# Altium PCB 202112AH743A100.PcbDoc (part 2 of 2)
Units mil, origin at the board's own origin, x right, y up, seen from the top; angles counter-clockwise.
Board outline 1968.5 x 1968.5 mil, 4 copper layers (Top Layer, Int1 (GND), Int2 (PWR), Bottom Layer), stack 52.573 mil thick; 109 components, 209 nets, 816 pads, 136 vias.
Unrouted connection lines stored in the file: 309.
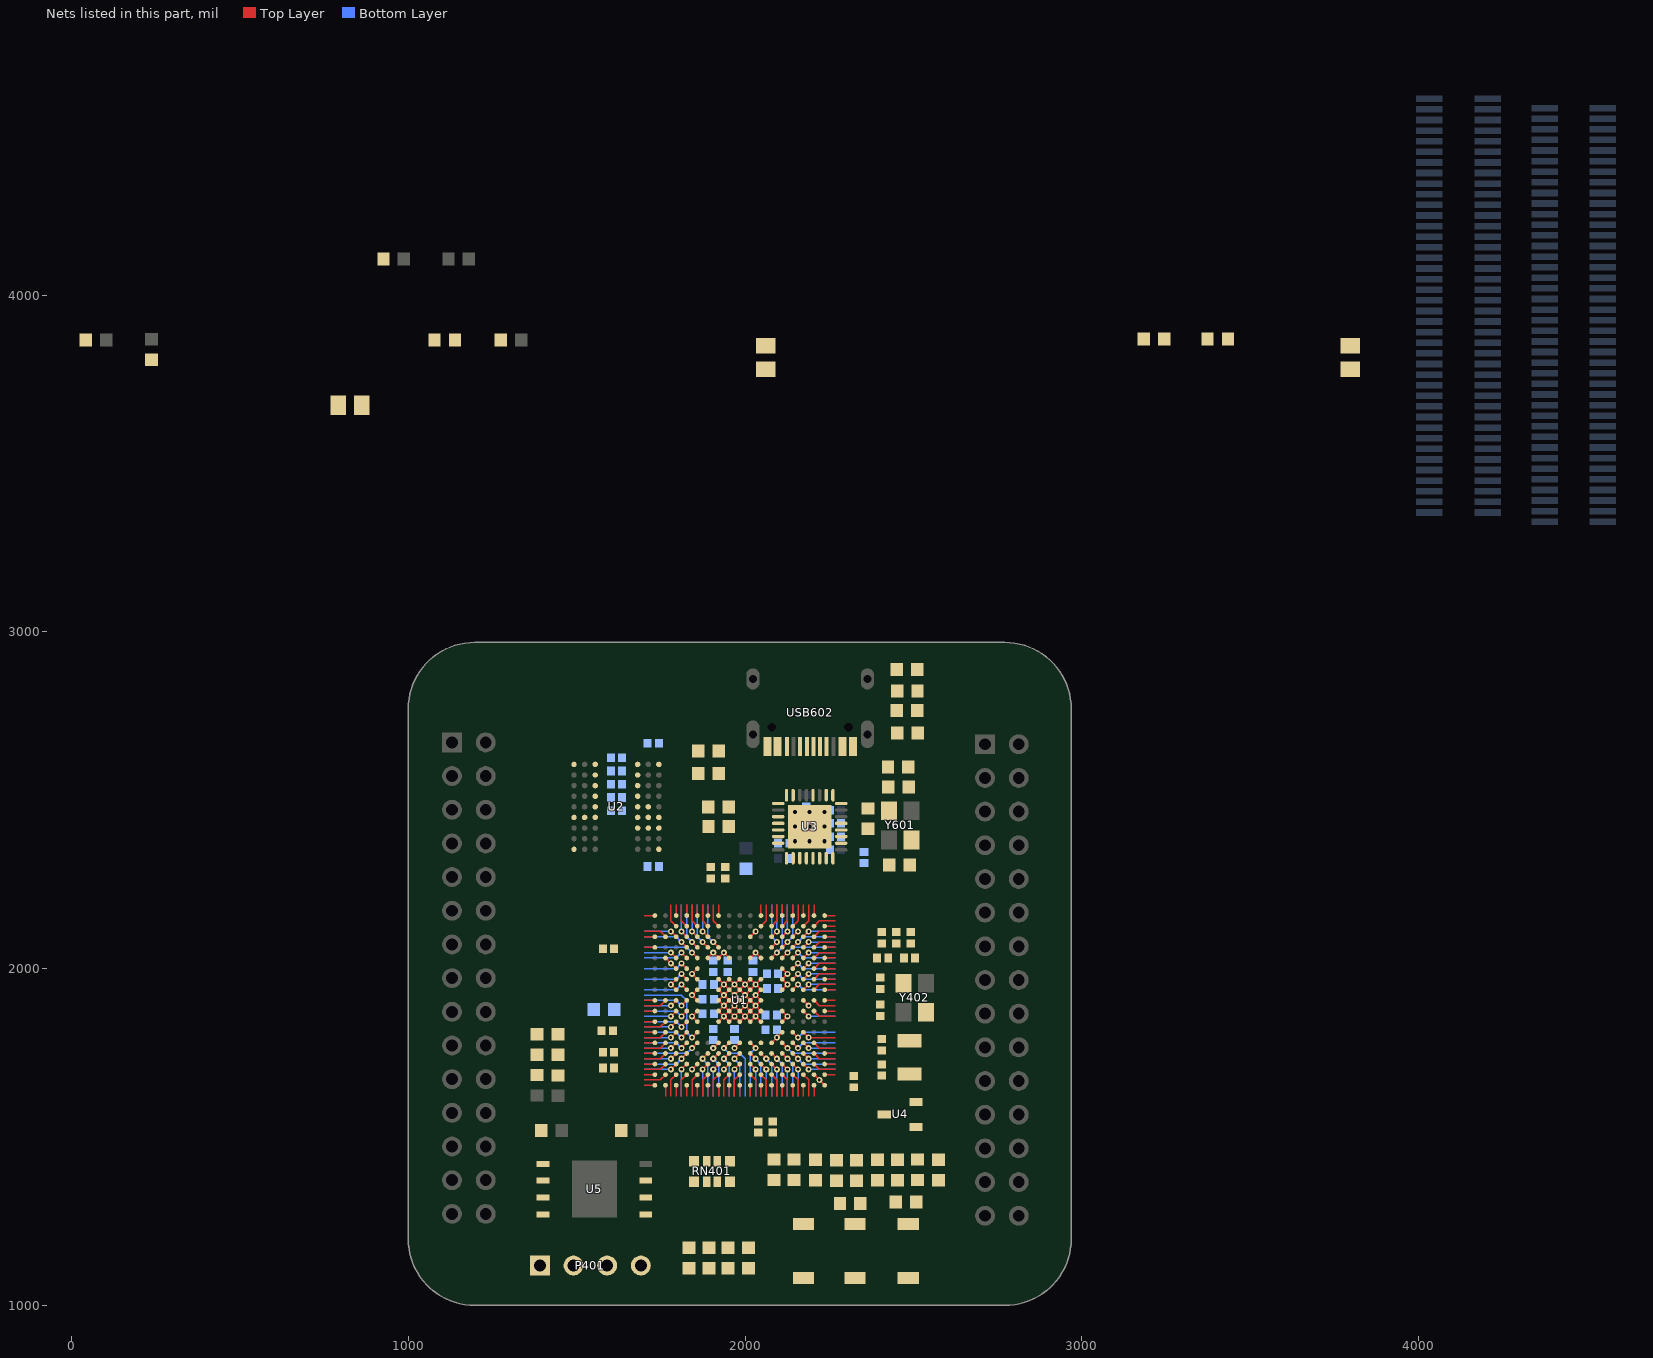
[diagram p2: the nets of this part, all layers, seen from the top]

## Via types
v1: diameter 18, hole 8, Top Layer to Bottom Layer, tented both sides, 127 vias
v2: diameter 24, hole 12, Top Layer to Bottom Layer, tented both sides, 9 vias

## Nets (pads, with @x,y where several pads share a name; then routed paths per layer and width w, separated by ;. In a path a pad name is that pad's centre, name@x,y a point inside that pad or via, vN(x,y) a via of type N, cw(c..) or ccw(c..) an arc to the next point about the centre after c; other vN are vias at no path point) (continued)
GND: C301.1 C302.1 C303.1 C304.1 C305.1 C306.1 C307.1 C308.1 C309.1 C310.1 C311.1 C312.1 C313.1 C322.1 C323.1 C324.1 C325.1 C326.1 C327.1 C328.1 C329.1 C330.1 C331.1 C333.1 C335.1 C401.1 C402.1 C403.1 C404.1 C405.1 C501.1 C502.1 C503.1 C504.1 C505.1 C506.1 C507.1 C508.1 C601.1 C603.1 C604.1 C605.1 C606.1 C607.1 C608.1 C609.1 C610.1 C611.1 C612.1 C613.1 C701.1 C901.1 C902.1 C903.1 C904.1 C905.1 C906.1 C907.1 D901.2 K401.1 K402.1 K403.1 P401.4 R402.2 R407.1 R410.1 R604.1 R607.1 R608.1 R903.1 U1.A1 U1.A17 U1.B2 U1.B6 U1.C10 U1.C13 U1.C16 U1.G7 U1.G8 U1.G9 U1.G10 U1.G11 U1.G16 U1.H7 U1.H8 U1.H9 U1.H10 U1.H11 U1.J3 U1.J7 U1.J8 U1.J9 U1.J10 U1.J11 U1.J16 U1.J17 U1.K7 U1.K8 U1.K9 U1.K10 U1.K11 U1.K15 U1.L7 U1.L8 U1.L9 U1.L10 U1.L11 U1.L15 U1.M15 U1.N1 U1.N16 U1.P1 U1.R4 U1.R8 U1.T12 U1.U1 U1.U17 U2.A1 U2.A3 U2.B7 U2.C3 U2.D7 U2.E3 U2.J1 U3.1 U3.2 U3.9 U3.33 U5.4 USB602.A1/B12 USB602.B1/A12 | length 2190.2
  Top Layer w4: 1700.28,1653.54 U1.A17@1732.28,1653.54 ; 1700.28,1700.79 1748.03,1700.79 U1.C16@1763.78,1716.54 ; 1700.28,1826.77 1748.03,1826.77 U1.G16@1763.78,1842.52 ; 1700.28,1889.76 1748.03,1889.76 U1.J16@1763.78,1905.51 ; 1700.28,1905.51 U1.J17@1732.28,1905.51 ; 1700.28,2157.48 U1.U17@1732.28,2157.48 ; U1.N16@1763.78,2031.5 v1(1779.53,2015.75) U1.M15@1795.28,2000 ; U1.K15@1795.28,1937.01 v1(1779.53,1952.76) U1.L15@1795.28,1968.5 ; v1(1842.52,1700.79) U1.C13@1858.27,1716.54 ; 1874.02,2189.48 1874.02,2141.73 U1.T12@1889.76,2125.98 ; U1.G11@1921.26,1842.52 v1(1937.01,1858.27) ; U1.L11@1921.26,1968.5 v1(1937.01,1952.76) ; v1(1937.01,1700.79) U1.C10@1952.76,1716.54 ; U1.R8@2015.75,2094.49 v1(2031.5,2110.24) ; U1.G7@2047.24,1842.52 v1(2031.5,1858.27) ; U1.L7@2047.24,1968.5 v1(2031.5,1952.76) ; U1.B6@2078.74,1685.04 2094.49,1669.29 2094.49,1621.54 ; U1.R4@2141.73,2094.49 v1(2157.48,2110.24) ; U1.J3@2173.23,1905.51 v1(2188.98,1889.76) ; U1.B2@2204.72,1685.04 v1(2220.47,1669.29) U1.A1@2236.22,1653.54 ; U1.N1@2236.22,2031.5 2268.22,2031.5 ; U1.P1@2236.22,2062.99 2268.22,2062.99 ; U1.U1@2236.22,2157.48 2268.22,2157.48 ; v1(1937.01,1858.27) U1.H11@1921.26,1874.02 v1(1937.01,1889.76) ; v1(1937.01,1858.27) U1.G10@1952.76,1842.52 v1(1968.5,1858.27) ; v1(1937.01,1858.27) U1.H10@1952.76,1874.02 ; v1(1937.01,1889.76) U1.J11@1921.26,1905.51 v1(1937.01,1921.26) ; v1(1937.01,1889.76) U1.H10@1952.76,1874.02 ; v1(1937.01,1889.76) U1.J10@1952.76,1905.51 ; v1(1937.01,1921.26) U1.K10@1952.76,1937.01 ; v1(1937.01,1921.26) U1.J10@1952.76,1905.51 ; v1(1937.01,1921.26) U1.K11@1921.26,1937.01 v1(1937.01,1952.76) ; v1(1937.01,1952.76) U1.L10@1952.76,1968.5 v1(1968.5,1952.76) ; v1(1937.01,1952.76) U1.K10@1952.76,1937.01 ; U1.H10@1952.76,1874.02 v1(1968.5,1889.76) ; U1.H10@1952.76,1874.02 v1(1968.5,1858.27) ; U1.J10@1952.76,1905.51 v1(1968.5,1889.76) ; U1.J10@1952.76,1905.51 v1(1968.5,1921.26) ; U1.K10@1952.76,1937.01 v1(1968.5,1952.76) ; U1.K10@1952.76,1937.01 v1(1968.5,1921.26) ; v1(1968.5,1858.27) U1.G9@1984.25,1842.52 v1(2000,1858.27) ; v1(1968.5,1858.27) U1.H9@1984.25,1874.02 ; v1(1968.5,1889.76) U1.H9@1984.25,1874.02 ; v1(1968.5,1889.76) U1.J9@1984.25,1905.51 ; v1(1968.5,1921.26) U1.J9@1984.25,1905.51 ; v1(1968.5,1921.26) U1.K9@1984.25,1937.01 ; v1(1968.5,1952.76) U1.L9@1984.25,1968.5 v1(2000,1952.76) ; v1(1968.5,1952.76) U1.K9@1984.25,1937.01 ; U1.H9@1984.25,1874.02 v1(2000,1858.27) ; U1.H9@1984.25,1874.02 v1(2000,1889.76) ; U1.J9@1984.25,1905.51 v1(2000,1921.26) ; U1.J9@1984.25,1905.51 v1(2000,1889.76) ; U1.K9@1984.25,1937.01 v1(2000,1952.76) ; U1.K9@1984.25,1937.01 v1(2000,1921.26) ; v1(2000,1858.27) U1.H8@2015.75,1874.02 ; v1(2000,1858.27) U1.G8@2015.75,1842.52 v1(2031.5,1858.27) ; v1(2000,1889.76) U1.H8@2015.75,1874.02 ; v1(2000,1889.76) U1.J8@2015.75,1905.51 ; v1(2000,1921.26) U1.K8@2015.75,1937.01 ; v1(2000,1921.26) U1.J8@2015.75,1905.51 ; v1(2000,1952.76) U1.K8@2015.75,1937.01 ; v1(2000,1952.76) U1.L8@2015.75,1968.5 v1(2031.5,1952.76) ; U1.H8@2015.75,1874.02 v1(2031.5,1889.76) ; U1.H8@2015.75,1874.02 v1(2031.5,1858.27) ; U1.J8@2015.75,1905.51 v1(2031.5,1921.26) ; U1.J8@2015.75,1905.51 v1(2031.5,1889.76) ; U1.K8@2015.75,1937.01 v1(2031.5,1952.76) ; v1(2031.5,1858.27) U1.H7@2047.24,1874.02 v1(2031.5,1889.76) ; v1(2031.5,1889.76) U1.J7@2047.24,1905.51 v1(2031.5,1921.26) ; v1(2031.5,1921.26) U1.K7@2047.24,1937.01 v1(2031.5,1952.76)
  other v2: 2148.62,2378.15 2191.93,2378.15 2235.24,2378.15 2148.62,2421.46 2191.93,2421.46 2235.24,2421.46 2148.62,2464.76 2191.93,2464.76 2235.24,2464.76
MCU_A3V3: C333.2 FB301.2 R301.1 U1.L1 | length 32
  Top Layer w4: U1.L1@2236.22,1968.5 2268.22,1968.5
MCU_AREF: C335.2 R301.2 U1.M1 | length 32
  Top Layer w4: U1.M1@2236.22,2000 2268.22,2000
MCU_BOOT0: R401.1 R402.1 U1.E8 | length 171
  Top Layer w4: U1.E8@2015.75,1779.53 v1(2031.5,1763.78)
  Bottom Layer w4: 2015.75,1621.54 2015.75,1748.03 v1(2031.5,1763.78)
MCU_NRST: C405.2 K401.2 U1.K1 | length 32
  Top Layer w4: U1.K1@2236.22,1937.01 2268.22,1937.01
MCU_PDR: C301.2 C302.2 C303.2 C304.2 C305.2 C306.2 C307.2 C308.2 C309.2 C310.2 C311.2 C312.2 C313.2 C322.2 C327.2 C328.2 C329.2 C330.2 C331.2 C904.2 D401.1 D402.1 D403.1 D404.1 FB301.1 FB901.2 P401.1 R401.2 R405.2 R408.2 U1.A6 U1.C17 U1.E6 U1.E7 U1.E9 U1.E11 U1.F5 U1.F17 U1.G5 U1.G13 U1.G17 U1.H5 U1.H13 U1.J13 U1.K5 U1.K13 U1.L5 U1.L13 U1.M5 U1.M13 U1.N7 U1.N8 U1.N10 U1.N11 U1.N12 U1.P17 U1.U12 U4.2 | length 682
  Top Layer w4: 1700.28,1716.54 U1.C17@1732.28,1716.54 ; 1700.28,1811.02 U1.F17@1732.28,1811.02 ; 1700.28,1842.52 U1.G17@1732.28,1842.52 ; 1700.28,2062.99 U1.P17@1732.28,2062.99 ; U1.G13@1858.27,1842.52 v1(1842.52,1858.27) U1.H13@1858.27,1874.02 ; U1.J13@1858.27,1905.51 v1(1842.52,1921.26) U1.K13@1858.27,1937.01 ; U1.L13@1858.27,1968.5 v1(1842.52,1984.25) U1.M13@1858.27,2000 ; U1.N12@1889.76,2031.5 v1(1905.51,2047.24) U1.N11@1921.26,2031.5 v1(1937.01,2047.24) U1.N10@1952.76,2031.5 ; U1.U12@1889.76,2157.48 1889.76,2189.48 ; v1(1905.51,1763.78) U1.E11@1921.26,1779.53 ; v1(1968.5,1763.78) U1.E9@1984.25,1779.53 ; U1.N8@2015.75,2031.5 v1(2031.5,2047.24) U1.N7@2047.24,2031.5 ; 2078.74,1621.54 U1.A6@2078.74,1653.54 ; U1.E6@2078.74,1779.53 v1(2094.49,1795.28) U1.F5@2110.24,1811.02 ; U1.G5@2110.24,1842.52 v1(2125.98,1858.27) U1.H5@2110.24,1874.02 ; U1.K5@2110.24,1937.01 v1(2125.98,1952.76) U1.L5@2110.24,1968.5 v1(2125.98,1984.25) U1.M5@2110.24,2000
MCU_VBAT: U4.1
NetC323_2: C323.2 U1.B1 U4.3 | length 32
  Top Layer w4: U1.B1@2236.22,1685.04 2268.22,1685.04
NetC324_2: C324.2 U1.U11 | length 32
  Top Layer w4: U1.U11@1921.26,2157.48 1921.26,2189.48
NetC325_2: C325.2 U1.D17 | length 32
  Top Layer w4: 1700.28,1748.03 U1.D17@1732.28,1748.03
NetC326_2: C326.2 U1.A7 | length 32
  Top Layer w4: 2047.24,1621.54 U1.A7@2047.24,1653.54
NetC406_1: C406.1 R407.2
NetC406_2: C406.2 K402.2 R405.1 R406.2
NetC407_1: C407.1 R410.2
NetC407_2: C407.2 K403.2 R408.1 R409.2
NetC610_2: C610.2 C611.2 U3.29
NetC612_2: C612.2 C613.2 U3.15 U3.26
NetC901_2: C901.2 F901.1 F903.2 R901.1
NetC903_2: C903.2 FB901.1 FB902.1 FB903.1 FB904.1
NetD401_2: D401.2 RN401.1
NetD402_2: D402.2 RN401.2
NetD403_2: D403.2 RN401.3
NetD404_2: D404.2 RN401.4
NetD901_1: D901.1 R901.2
NetR601_2: R601.2 U3.4
NetR604_2: R604.2 U3.32
NetR607_2: R607.2 USB602.A5
NetR608_2: R608.2 USB602.B5
PA0: U1.N5 | length 171
  Top Layer w4: U1.N5@2110.24,2031.5 v1(2125.98,2047.24)
  Bottom Layer w4: v1(2125.98,2047.24) 2141.73,2062.99 2268.22,2062.99
PA0_C: U1.T1 | length 32
  Top Layer w4: U1.T1@2236.22,2125.98 2268.22,2125.98
PA1: U1.N4 | length 139.5
  Top Layer w4: U1.N4@2141.73,2031.5 v1(2157.48,2047.24)
  Bottom Layer w4: v1(2157.48,2047.24) 2173.23,2031.5 2268.22,2031.5
PA1_C: U1.T2 | length 70
  Top Layer w4: U1.T2@2204.72,2125.98 2220.47,2141.73 2268.22,2141.73
PA2: U1.N3 | length 101.5
  Top Layer w4: U1.N3@2173.23,2031.5 v1(2188.98,2047.24)
  Bottom Layer w4: v1(2188.98,2047.24) 2268.22,2047.24
PA3: U1.U2 U3.24 | length 32
  Top Layer w4: U1.U2@2204.72,2157.48 2204.72,2189.48
PA4: U1.U3 | length 32
  Top Layer w4: U1.U3@2173.23,2157.48 2173.23,2189.48
PA5: U1.T3 U3.14 | length 70
  Top Layer w4: U1.T3@2173.23,2125.98 2188.98,2141.73 2188.98,2189.48
PA6: U1.R3 | length 101.5
  Top Layer w4: U1.R3@2173.23,2094.49 v1(2188.98,2110.24)
  Bottom Layer w4: v1(2188.98,2110.24) 2268.22,2110.24
PA7: U1.R5 | length 101.5
  Top Layer w4: U1.R5@2110.24,2094.49 v1(2125.98,2110.24)
  Bottom Layer w4: v1(2125.98,2110.24) 2125.98,2189.48
PA8: U1.E15 | length 101.5
  Top Layer w4: v1(1779.53,1763.78) U1.E15@1795.28,1779.53
  Bottom Layer w4: 1700.28,1763.78 v1(1779.53,1763.78)
PA9: U1.D15 | length 101.5
  Top Layer w4: v1(1779.53,1732.28) U1.D15@1795.28,1748.03
  Bottom Layer w4: 1700.28,1732.28 v1(1779.53,1732.28)
PA10: U1.D14 | length 139.5
  Top Layer w4: v1(1811.02,1732.28) U1.D14@1826.77,1748.03
  Bottom Layer w4: 1700.28,1716.54 1795.28,1716.54 v1(1811.02,1732.28)
PA11: U1.E17 | length 32
  Top Layer w4: 1700.28,1779.53 U1.E17@1732.28,1779.53
PA12: U1.E16 | length 70
  Top Layer w4: 1700.28,1763.78 1748.03,1763.78 U1.E16@1763.78,1779.53
PA13: P401.2 U1.C15 | length 101.5
  Top Layer w4: v1(1779.53,1700.79) U1.C15@1795.28,1716.54
  Bottom Layer w4: 1700.28,1700.79 v1(1779.53,1700.79)
PA14: P401.3 U1.B14 | length 70
  Top Layer w4: 1811.02,1621.54 1811.02,1669.29 U1.B14@1826.77,1685.04
PA15: U1.A14 | length 32
  Top Layer w4: 1826.77,1621.54 U1.A14@1826.77,1653.54
PB0: U1.U5 U3.23 | length 32
  Top Layer w4: U1.U5@2110.24,2157.48 2110.24,2189.48
PB1: U1.T5 U3.22 | length 70
  Top Layer w4: U1.T5@2110.24,2125.98 2125.98,2141.73 2125.98,2189.48
PB2: U1.R6 | length 101.5
  Top Layer w4: U1.R6@2078.74,2094.49 v1(2094.49,2110.24)
  Bottom Layer w4: v1(2094.49,2110.24) 2094.49,2189.48
PB3: R406.1 U1.C6 | length 101.5
  Top Layer w4: U1.C6@2078.74,1716.54 v1(2094.49,1700.79)
  Bottom Layer w4: 2094.49,1621.54 v1(2094.49,1700.79)
PB4: U1.B7 | length 70
  Top Layer w4: U1.B7@2047.24,1685.04 2062.99,1669.29 2062.99,1621.54
PB5: U1.A5 U3.17 | length 32
  Top Layer w4: 2110.24,1621.54 U1.A5@2110.24,1653.54
PB6: R701.1 U1.B5 U5.1 | length 70
  Top Layer w4: U1.B5@2110.24,1685.04 2125.98,1669.29 2125.98,1621.54
PB7: U1.C5 | length 101.5
  Top Layer w4: U1.C5@2110.24,1716.54 v1(2125.98,1700.79)
  Bottom Layer w4: 2125.98,1621.54 v1(2125.98,1700.79)
PB8: U1.D5 | length 139.5
  Top Layer w4: U1.D5@2110.24,1748.03 v1(2125.98,1732.28)
  Bottom Layer w4: v1(2125.98,1732.28) 2141.73,1716.54 2141.73,1621.54
PB9: U1.D4 | length 139.5
  Top Layer w4: U1.D4@2141.73,1748.03 v1(2157.48,1732.28)
  Bottom Layer w4: v1(2157.48,1732.28) 2173.23,1716.54 2268.22,1716.54
PB10: U1.P11 U3.21 | length 139.5
  Top Layer w4: v1(1905.51,2078.74) U1.P11@1921.26,2062.99
  Bottom Layer w4: 1889.76,2189.48 1889.76,2094.49 v1(1905.51,2078.74)
PB11: U1.P12 U3.20 | length 139.5
  Top Layer w4: v1(1874.02,2078.74) U1.P12@1889.76,2062.99
  Bottom Layer w4: 1858.27,2189.48 1858.27,2094.49 v1(1874.02,2078.74)
PB12: U1.T14 U3.19 | length 70
  Top Layer w4: 1811.02,2189.48 1811.02,2141.73 U1.T14@1826.77,2125.98
PB13: U1.U14 U3.18 | length 32
  Top Layer w4: U1.U14@1826.77,2157.48 1826.77,2189.48
PB14: U1.U15 | length 32
  Top Layer w4: U1.U15@1795.28,2157.48 1795.28,2189.48
PB15: U1.T15 | length 70
  Top Layer w4: 1779.53,2189.48 1779.53,2141.73 U1.T15@1795.28,2125.98
PC0: U1.L2 U3.13 | length 70
  Top Layer w4: U1.L2@2204.72,1968.5 2220.47,1984.25 2268.22,1984.25
PC1: U1.M2 | length 70
  Top Layer w4: U1.M2@2204.72,2000 2220.47,2015.75 2268.22,2015.75
PC2: R501.1 U1.M3 U2.G9 | length 101.5
  Top Layer w4: U1.M3@2173.23,2000 v1(2188.98,2015.75)
  Bottom Layer w4: v1(2188.98,2015.75) 2268.22,2015.75
PC2_C: U1.R1 | length 32
  Top Layer w4: U1.R1@2236.22,2094.49 2268.22,2094.49
PC3: U1.M4 U2.F3 | length 139.5
  Top Layer w4: U1.M4@2141.73,2000 v1(2157.48,2015.75)
  Bottom Layer w4: v1(2157.48,2015.75) 2173.23,2000 2268.22,2000
PC3_C: U1.R2 | length 70
  Top Layer w4: U1.R2@2204.72,2094.49 2220.47,2110.24 2268.22,2110.24
PC4: U1.T4 | length 70
  Top Layer w4: U1.T4@2141.73,2125.98 2157.48,2141.73 2157.48,2189.48
PC5: U1.U4 | length 32
  Top Layer w4: U1.U4@2141.73,2157.48 2141.73,2189.48
PC6: U1.F14 | length 139.5
  Top Layer w4: v1(1811.02,1795.28) U1.F14@1826.77,1811.02
  Bottom Layer w4: 1700.28,1811.02 1795.28,1811.02 v1(1811.02,1795.28)
PC7: U1.F13 | length 272.1
  Top Layer w4: v1(1842.52,1795.28) U1.F13@1858.27,1811.02
  Bottom Layer w4: 1700.28,1921.26 1811.02,1921.26 1826.77,1905.51 1826.77,1811.02 v1(1842.52,1795.28)
PC8: U1.E13 | length 171
  Top Layer w4: v1(1842.52,1763.78) U1.E13@1858.27,1779.53
  Bottom Layer w4: 1700.28,1748.03 1826.77,1748.03 v1(1842.52,1763.78)
PC9: U1.E14 | length 139.5
  Top Layer w4: v1(1811.02,1763.78) U1.E14@1826.77,1779.53
  Bottom Layer w4: 1700.28,1779.53 1795.28,1779.53 v1(1811.02,1763.78)
PC10: U1.A13 U5.2 | length 32
  Top Layer w4: 1858.27,1621.54 U1.A13@1858.27,1653.54
PC11: U1.B13 | length 70
  Top Layer w4: 1842.52,1621.54 1842.52,1669.29 U1.B13@1858.27,1685.04
PC12: U1.C12 | length 101.5
  Top Layer w4: v1(1874.02,1700.79) U1.C12@1889.76,1716.54
  Bottom Layer w4: 1874.02,1621.54 v1(1874.02,1700.79)
PC13: U1.E3 | length 101.5
  Top Layer w4: U1.E3@2173.23,1779.53 v1(2188.98,1763.78)
  Bottom Layer w4: v1(2188.98,1763.78) 2268.22,1763.78
PC14: C401.2 U1.C2 Y401.1 | length 70
  Top Layer w4: U1.C2@2204.72,1716.54 2220.47,1700.79 2268.22,1700.79
PC15: C402.2 U1.C1 Y401.2 | length 32
  Top Layer w4: U1.C1@2236.22,1716.54 2268.22,1716.54
PD2: U1.D12 | length 139.5
  Top Layer w4: v1(1874.02,1732.28) U1.D12@1889.76,1748.03
  Bottom Layer w4: v1(1874.02,1732.28) 1889.76,1716.54 1889.76,1621.54
PD3: U1.B12 | length 70
  Top Layer w4: 1874.02,1621.54 1874.02,1669.29 U1.B12@1889.76,1685.04
PD4: U1.A12 | length 32
  Top Layer w4: 1889.76,1621.54 U1.A12@1889.76,1653.54
PD5: U1.A11 | length 32
  Top Layer w4: 1921.26,1621.54 U1.A11@1921.26,1653.54
PD6: U1.B11 | length 70
  Top Layer w4: 1905.51,1621.54 1905.51,1669.29 U1.B11@1921.26,1685.04
PD7: U1.C11 | length 101.5
  Top Layer w4: v1(1905.51,1700.79) U1.C11@1921.26,1716.54
  Bottom Layer w4: 1905.51,1621.54 v1(1905.51,1700.79)
PD11: U1.R15 | length 101.5
  Top Layer w4: v1(1779.53,2110.24) U1.R15@1795.28,2094.49
  Bottom Layer w4: 1700.28,2110.24 v1(1779.53,2110.24)
PD12: U1.R16 | length 70
  Top Layer w4: 1700.28,2110.24 1748.03,2110.24 U1.R16@1763.78,2094.49
PD13: U1.R17 | length 32
  Top Layer w4: 1700.28,2094.49 U1.R17@1732.28,2094.49
PE0: U1.C4 U2.E8 | length 101.5
  Top Layer w4: U1.C4@2141.73,1716.54 v1(2157.48,1700.79)
  Bottom Layer w4: 2157.48,1621.54 v1(2157.48,1700.79)
PE1: U1.B4 U2.F1 | length 70
  Top Layer w4: U1.B4@2141.73,1685.04 2157.48,1669.29 2157.48,1621.54
PE2: U1.C3 U5.3 | length 101.5
  Top Layer w4: U1.C3@2173.23,1716.54 v1(2188.98,1700.79)
  Bottom Layer w4: v1(2188.98,1700.79) 2268.22,1700.79
PE3: U1.D3 | length 101.5
  Top Layer w4: U1.D3@2173.23,1748.03 v1(2188.98,1732.28)
  Bottom Layer w4: v1(2188.98,1732.28) 2268.22,1732.28
PE4: U1.D2 | length 70
  Top Layer w4: U1.D2@2204.72,1748.03 2220.47,1732.28 2268.22,1732.28
PE5: U1.D1 | length 32
  Top Layer w4: U1.D1@2236.22,1748.03 2268.22,1748.03
PE6: U1.E5 | length 171
  Top Layer w4: U1.E5@2110.24,1779.53 v1(2125.98,1763.78)
  Bottom Layer w4: v1(2125.98,1763.78) 2141.73,1748.03 2268.22,1748.03
PF6: U1.K2 U5.7 | length 70
  Top Layer w4: U1.K2@2204.72,1937.01 2220.47,1952.76 2268.22,1952.76
PF7: U1.K3 | length 101.5
  Top Layer w4: U1.K3@2173.23,1937.01 v1(2188.98,1952.76)
  Bottom Layer w4: v1(2188.98,1952.76) 2268.22,1952.76
PF8: U1.K4 U5.5 | length 139.5
  Top Layer w4: U1.K4@2141.73,1937.01 v1(2157.48,1952.76)
  Bottom Layer w4: v1(2157.48,1952.76) 2173.23,1937.01 2268.22,1937.01
PF9: U1.L4 | length 139.5
  Top Layer w4: U1.L4@2141.73,1968.5 v1(2157.48,1984.25)
  Bottom Layer w4: v1(2157.48,1984.25) 2173.23,1968.5 2268.22,1968.5
PF10: U1.L3 U5.6 | length 101.5
  Top Layer w4: U1.L3@2173.23,1968.5 v1(2188.98,1984.25)
  Bottom Layer w4: v1(2188.98,1984.25) 2268.22,1984.25
PF11: U1.T7 U2.F8 | length 70
  Top Layer w4: U1.T7@2047.24,2125.98 2062.99,2141.73 2062.99,2189.48
PG3: U1.H15 | length 101.5
  Top Layer w4: v1(1779.53,1858.27) U1.H15@1795.28,1874.02
  Bottom Layer w4: 1700.28,1858.27 v1(1779.53,1858.27)
PG4: U1.H14 U2.G7 | length 139.5
  Top Layer w4: v1(1811.02,1858.27) U1.H14@1826.77,1874.02
  Bottom Layer w4: 1700.28,1874.02 1795.28,1874.02 v1(1811.02,1858.27)
PG5: U1.G14 U2.G8 | length 139.5
  Top Layer w4: v1(1811.02,1826.77) U1.G14@1826.77,1842.52
  Bottom Layer w4: 1700.28,1842.52 1795.28,1842.52 v1(1811.02,1826.77)
PG6: U1.G15 | length 101.5
  Top Layer w4: v1(1779.53,1826.77) U1.G15@1795.28,1842.52
  Bottom Layer w4: 1700.28,1826.77 v1(1779.53,1826.77)
PG7: U1.F16 | length 70
  Top Layer w4: 1700.28,1795.28 1748.03,1795.28 U1.F16@1763.78,1811.02
PG8: U1.F15 U2.F2 | length 101.5
  Top Layer w4: v1(1779.53,1795.28) U1.F15@1795.28,1811.02
  Bottom Layer w4: 1700.28,1795.28 v1(1779.53,1795.28)
PG9: U1.A10 | length 32
  Top Layer w4: 1952.76,1621.54 U1.A10@1952.76,1653.54
PG10: U1.A9 | length 32
  Top Layer w4: 1984.25,1621.54 U1.A9@1984.25,1653.54
PG11: U1.B9 | length 70
  Top Layer w4: 1968.5,1621.54 1968.5,1669.29 U1.B9@1984.25,1685.04
PG12: U1.C9 | length 101.5
  Top Layer w4: v1(1968.5,1700.79) U1.C9@1984.25,1716.54
  Bottom Layer w4: 1968.5,1621.54 v1(1968.5,1700.79)
PG13: U1.D9 | length 139.5
  Top Layer w4: v1(1968.5,1732.28) U1.D9@1984.25,1748.03
  Bottom Layer w4: v1(1968.5,1732.28) 1984.25,1716.54 1984.25,1621.54
PG14: U1.D8 | length 139.5
  Top Layer w4: U1.D8@2015.75,1748.03 v1(2031.5,1732.28)
  Bottom Layer w4: v1(2031.5,1732.28) 2047.24,1716.54 2047.24,1621.54
PG15: U1.D6 U2.F7 | length 139.5
  Top Layer w4: U1.D6@2078.74,1748.03 v1(2094.49,1732.28)
  Bottom Layer w4: v1(2094.49,1732.28) 2110.24,1716.54 2110.24,1621.54
PH0: C403.2 U1.J2 Y402.1 | length 70
  Top Layer w4: U1.J2@2204.72,1905.51 2220.47,1889.76 2268.22,1889.76
PH1: C404.2 U1.J1 Y402.3 | length 32
  Top Layer w4: U1.J1@2236.22,1905.51 2268.22,1905.51
PH2: U1.N2 | length 70
  Top Layer w4: U1.N2@2204.72,2031.5 2220.47,2047.24 2268.22,2047.24
PH3: U1.P2 | length 70
  Top Layer w4: U1.P2@2204.72,2062.99 2220.47,2078.74 2268.22,2078.74
PH4: U1.P3 U3.11 | length 101.5
  Top Layer w4: U1.P3@2173.23,2062.99 v1(2188.98,2078.74)
  Bottom Layer w4: v1(2188.98,2078.74) 2268.22,2078.74
PH5: U1.P4 U2.F9 | length 139.5
  Top Layer w4: U1.P4@2141.73,2062.99 v1(2157.48,2078.74)
  Bottom Layer w4: v1(2157.48,2078.74) 2173.23,2094.49 2268.22,2094.49
PH6: U1.T11 | length 70
  Top Layer w4: 1905.51,2189.48 1905.51,2141.73 U1.T11@1921.26,2125.98
PH7: U1.U13 | length 32
  Top Layer w4: U1.U13@1858.27,2157.48 1858.27,2189.48
PH8: U1.T13 | length 70
  Top Layer w4: 1842.52,2189.48 1842.52,2141.73 U1.T13@1858.27,2125.98
PH9: U1.R13 | length 101.5
  Top Layer w4: v1(1842.52,2110.24) U1.R13@1858.27,2094.49
  Bottom Layer w4: v1(1842.52,2110.24) 1842.52,2189.48
PH10: U1.P13 | length 139.5
  Top Layer w4: v1(1842.52,2078.74) U1.P13@1858.27,2062.99
  Bottom Layer w4: 1826.77,2189.48 1826.77,2094.49 v1(1842.52,2078.74)
PH11: U1.P14 | length 139.5
  Top Layer w4: v1(1811.02,2078.74) U1.P14@1826.77,2062.99
  Bottom Layer w4: 1700.28,2094.49 1795.28,2094.49 v1(1811.02,2078.74)
PH12: U1.R14 | length 101.5
  Top Layer w4: v1(1811.02,2110.24) U1.R14@1826.77,2094.49
  Bottom Layer w4: v1(1811.02,2110.24) 1811.02,2189.48
PH13: U1.D16 | length 70
  Top Layer w4: 1700.28,1732.28 1748.03,1732.28 U1.D16@1763.78,1748.03
PH14: U1.B17 | length 32
  Top Layer w4: 1700.28,1685.04 U1.B17@1732.28,1685.04
PH15: U1.B16 | length 70
  Top Layer w4: 1700.28,1669.29 1748.03,1669.29 U1.B16@1763.78,1685.04
PI0: U1.A16 | length 32
  Top Layer w4: 1763.78,1621.54 U1.A16@1763.78,1653.54
PI1: U1.A15 | length 32
  Top Layer w4: 1795.28,1621.54 U1.A15@1795.28,1653.54
PI2: U1.B15 | length 70
  Top Layer w4: 1779.53,1621.54 1779.53,1669.29 U1.B15@1795.28,1685.04
PI3: U1.C14 | length 101.5
  Top Layer w4: v1(1811.02,1700.79) U1.C14@1826.77,1716.54
  Bottom Layer w4: 1811.02,1621.54 v1(1811.02,1700.79)
PI4: U1.A4 | length 32
  Top Layer w4: 2141.73,1621.54 U1.A4@2141.73,1653.54
PI5: U1.A3 | length 32
  Top Layer w4: 2173.23,1621.54 U1.A3@2173.23,1653.54
PI6: U1.A2 | length 32
  Top Layer w4: 2204.72,1621.54 U1.A2@2204.72,1653.54
PI7: U1.B3 | length 70
  Top Layer w4: U1.B3@2173.23,1685.04 2188.98,1669.29 2188.98,1621.54
PI8: U1.E4 | length 139.5
  Top Layer w4: U1.E4@2141.73,1779.53 v1(2157.48,1763.78)
  Bottom Layer w4: v1(2157.48,1763.78) 2173.23,1779.53 2268.22,1779.53
PI9: U1.E2 | length 70
  Top Layer w4: U1.E2@2204.72,1779.53 2220.47,1763.78 2268.22,1763.78
PI10: U1.F3 | length 101.5
  Top Layer w4: U1.F3@2173.23,1811.02 v1(2188.98,1795.28) 2268.22,1795.28
PI11: U1.F4 U3.12 | length 139.5
  Top Layer w4: U1.F4@2141.73,1811.02 v1(2157.48,1795.28)
  Bottom Layer w4: v1(2157.48,1795.28) 2173.23,1811.02 2268.22,1811.02
PI12: U1.H1 | length 32
  Top Layer w4: U1.H1@2236.22,1874.02 2268.22,1874.02
PI13: U1.H2 | length 70
  Top Layer w4: U1.H2@2204.72,1874.02 2220.47,1858.27 2268.22,1858.27
PI14: U1.H3 | length 101.5
  Top Layer w4: U1.H3@2173.23,1874.02 v1(2188.98,1858.27)
  Bottom Layer w4: v1(2188.98,1858.27) 2268.22,1858.27
PI15: U1.P5 | length 139.5
  Top Layer w4: U1.P5@2110.24,2062.99 v1(2125.98,2078.74)
  Bottom Layer w4: v1(2125.98,2078.74) 2141.73,2094.49 2141.73,2189.48
PJ0: U1.N6 | length 171
  Top Layer w4: U1.N6@2078.74,2031.5 v1(2094.49,2047.24)
  Bottom Layer w4: v1(2094.49,2047.24) 2110.24,2062.99 2110.24,2189.48
PJ1: U1.P6 | length 139.5
  Top Layer w4: U1.P6@2078.74,2062.99 v1(2094.49,2078.74)
  Bottom Layer w4: 2078.74,2189.48 2078.74,2094.49 v1(2094.49,2078.74)
PJ2: U1.T6 | length 70
  Top Layer w4: U1.T6@2078.74,2125.98 2094.49,2141.73 2094.49,2189.48
PJ3: U1.U6 | length 32
  Top Layer w4: U1.U6@2078.74,2157.48 2078.74,2189.48
PJ4: U1.U7 | length 32
  Top Layer w4: U1.U7@2047.24,2157.48 2047.24,2189.48
PJ5: U1.R12 | length 101.5
  Top Layer w4: v1(1874.02,2110.24) U1.R12@1889.76,2094.49
  Bottom Layer w4: v1(1874.02,2110.24) 1874.02,2189.48
PJ6: U1.N15 | length 101.5
  Top Layer w4: v1(1779.53,2047.24) U1.N15@1795.28,2031.5
  Bottom Layer w4: 1700.28,2047.24 v1(1779.53,2047.24)
PJ7: U1.N14 | length 139.5
  Top Layer w4: v1(1811.02,2047.24) U1.N14@1826.77,2031.5
  Bottom Layer w4: 1700.28,2031.5 1795.28,2031.5 v1(1811.02,2047.24)
PJ8: U1.N13 | length 171
  Top Layer w4: v1(1842.52,2047.24) U1.N13@1858.27,2031.5
  Bottom Layer w4: 1700.28,2062.99 1826.77,2062.99 v1(1842.52,2047.24)
PJ9: U1.M14 | length 139.5
  Top Layer w4: v1(1811.02,2015.75) U1.M14@1826.77,2000
  Bottom Layer w4: 1700.28,2000 1795.28,2000 v1(1811.02,2015.75)
PJ10: U1.L14 | length 139.5
  Top Layer w4: v1(1811.02,1984.25) U1.L14@1826.77,1968.5
  Bottom Layer w4: 1700.28,1968.5 1795.28,1968.5 v1(1811.02,1984.25)
PJ11: U1.K14 | length 139.5
  Top Layer w4: v1(1811.02,1952.76) U1.K14@1826.77,1937.01
  Bottom Layer w4: 1700.28,1937.01 1795.28,1937.01 v1(1811.02,1952.76)
PJ12: U1.D11 | length 139.5
  Top Layer w4: v1(1905.51,1732.28) U1.D11@1921.26,1748.03
  Bottom Layer w4: v1(1905.51,1732.28) 1921.26,1716.54 1921.26,1621.54
PJ13: U1.E10 | length 209.1
  Top Layer w4: v1(1937.01,1763.78) U1.E10@1952.76,1779.53
  Bottom Layer w4: v1(1937.01,1763.78) 1952.76,1748.03 1984.25,1748.03 2000,1732.28 2000,1621.54
PJ14: U1.D10 | length 139.5
  Top Layer w4: v1(1937.01,1732.28) U1.D10@1952.76,1748.03
  Bottom Layer w4: v1(1937.01,1732.28) 1952.76,1716.54 1952.76,1621.54
PJ15: U1.B10 | length 70
  Top Layer w4: 1937.01,1621.54 1937.01,1669.29 U1.B10@1952.76,1685.04
PK0: U1.J14 | length 139.5
  Top Layer w4: v1(1811.02,1889.76) U1.J14@1826.77,1905.51
  Bottom Layer w4: 1700.28,1905.51 1795.28,1905.51 v1(1811.02,1889.76)
PK1: U1.J15 | length 101.5
  Top Layer w4: v1(1779.53,1889.76) U1.J15@1795.28,1905.51
  Bottom Layer w4: 1700.28,1889.76 v1(1779.53,1889.76)
PK2: U1.H17 | length 32
  Top Layer w4: 1700.28,1874.02 U1.H17@1732.28,1874.02
PK3: RN401.8 U1.C8 | length 101.5
  Top Layer w4: U1.C8@2015.75,1716.54 v1(2031.5,1700.79)
  Bottom Layer w4: 2031.5,1621.54 v1(2031.5,1700.79)
PK4: RN401.7 U1.B8 | length 70
  Top Layer w4: U1.B8@2015.75,1685.04 2031.5,1669.29 2031.5,1621.54
PK5: RN401.6 U1.A8 | length 32
  Top Layer w4: 2015.75,1621.54 U1.A8@2015.75,1653.54
PK6: RN401.5 U1.C7 | length 101.5
  Top Layer w4: U1.C7@2047.24,1716.54 v1(2062.99,1700.79)
  Bottom Layer w4: 2062.99,1621.54 v1(2062.99,1700.79)
PK7: R409.1 U1.D7 | length 139.5
  Top Layer w4: U1.D7@2047.24,1748.03 v1(2062.99,1732.28)
  Bottom Layer w4: v1(2062.99,1732.28) 2078.74,1716.54 2078.74,1621.54
SDRAM_D3V3: C501.2 C502.2 C503.2 C504.2 C505.2 C506.2 C507.2 C508.2 C905.2 FB902.2 R501.2 U2.A7 U2.A9 U2.B3 U2.C7 U2.D3 U2.E7 U2.J9
USB_HS_DM: U3.8 USB602.A7 USB602.B7
USB_HS_DP: U3.7 USB602.A6 USB602.B6
USB_XI: C604.2 R603.2 U3.28 Y601.3
USB_XO: C603.2 R603.1 U3.27 Y601.1
VBUS_HS: C601.2 F903.1 R601.1 USB602.A4/B9 USB602.B4/A9
VIN_EXT: F901.2
pads on no net: C902.2 P801.1 P801.2 P801.3 P801.4 P801.5 P801.6 P801.7 P801.8 P801.9 P801.10 P801.11 P801.12 P801.13 P801.14 P801.15 P801.16 P801.17 P801.18 P801.19 P801.20 P801.21 P801.22 P801.23 P801.24 P801.25 P801.26 P801.27 P801.28 P801.29 P801.30 P802.1 P802.2 P802.3 P802.4 P802.5 P802.6 P802.7 P802.8 P802.9 P802.10 P802.11 P802.12 P802.13 P802.14 P802.15 P802.16 P802.17 P802.18 P802.19 P802.20 P802.21 P802.22 P802.23 P802.24 P802.25 P802.26 P802.27 P802.28 P802.29 P802.30 P803. P803.1 P803.2 P803.3 P803.4 P803.5 P803.6 P803.7 P803.8 P803.9 P803.10 P803.11 P803.12 P803.13 P803.14 P803.15 P803.16 P803.17 P803.18 P803.19 P803.20 P803.21 P803.22 P803.23 P803.24 P803.25 P803.26 P803.27 P803.28 P803.29 P803.30 P803.31 P803.32 P803.33 P803.34 P803.35 P803.36 P803.37 P803.38 P803.39 P803.40 P803.41 P803.42 P803.43 P803.44 P803.45 P803.46 P803.47 P803.48 P803.49 P803.50 P803.51 P803.52 P803.53 P803.54 P803.55 P803.56 P803.57 P803.58 P803.59 P803.60 P803.61 P803.62 P803.63 P803.64 P803.65 P803.66 P803.67 P803.68 P803.69 P803.70 P803.71 P803.72 P803.73 P803.74 P803.75 P803.76 P803.77 P803.78 P803.79 P803.80 P804. P804.1 P804.2 P804.3 P804.4 P804.5 P804.6 P804.7 P804.8 P804.9 P804.10 P804.11 P804.12 P804.13 P804.14 P804.15 P804.16 P804.17 P804.18 P804.19 P804.20 P804.21 P804.22 P804.23 P804.24 P804.25 P804.26 P804.27 P804.28 P804.29 P804.30 P804.31 P804.32 P804.33 P804.34 P804.35 P804.36 P804.37 P804.38 P804.39 P804.40 P804.41 P804.42 P804.43 P804.44 P804.45 P804.46 P804.47 P804.48 P804.49 P804.50 P804.51 P804.52 P804.53 P804.54 P804.55 P804.56 P804.57 P804.58 P804.59 P804.60 P804.61 P804.62 P804.63 P804.64 P804.65 P804.66 P804.67 P804.68 P804.69 P804.70 P804.71 P804.72 P804.73 P804.74 P804.75 P804.76 P804.77 P804.78 P804.79 P804.80 R902.1 R902.2 R903.2 U1.E1 U1.F1 U1.F2 U1.G2 U1.K16 U1.K17 U1.L16 U1.L17 U1.M16 U1.M17 U1.N17 U2.E2 U3.3 U3.5 U3.10 U5.9 USB602.0 USB602.A8 USB602.B8 Y402.2 Y402.4 Y601.2 Y601.4

## Silkscreen, mask and mechanical layers (free items; w line width, h text height)
Mechanical 1:
  lines w7.87: 921.26,1000 1078.74,1000 ; 921.26,2968.5 1078.74,2968.5 ; 1000,921.26 1000,1078.74 ; 1000,2889.76 1000,3047.24 ; 2889.76,1000 3047.24,1000 ; 2889.76,2968.5 3047.24,2968.5 ; 2968.5,921.26 2968.5,1078.74 ; 2968.5,2889.76 2968.5,3047.24
  lines w10: 1000,1196.85 ccw(c1196.85,1196.85) 1196.85,1000 2771.65,1000 ccw(c2771.65,1196.85) 2968.5,1196.85 2968.5,2771.65 ccw(c2771.65,2771.65) 2771.65,2968.5 1196.85,2968.5 ccw(c1196.85,2771.65) 1000,2771.65 1000,1196.85
Mechanical 15:
  lines w7.87: 2968.5,1000 2968.5,1000

## Text inside footprints (layer, text, board x,y; h text height)
U1: Top Overlay "A" at 2287.4,1633.86 h35; Top Overlay "U" at 2287.4,2137.79 h35; Top Overlay "1" at 2232.28,1562.99 h35; Top Overlay "17" at 1708.66,1562.99 h35
USB602: Mechanical 1 "PCB Edge" at 2307.09,2949.65 h32 r180